# Altium PCB WX0.011.345PCB.PcbDoc
Units mil, origin at the board's own origin, x right, y up, seen from the top; angles counter-clockwise.
Board outline 2858.38 x 6639.95 mil, 2 copper layers (Top Layer, Bottom Layer); 15 components, 5 nets, 37 pads, 103 vias.
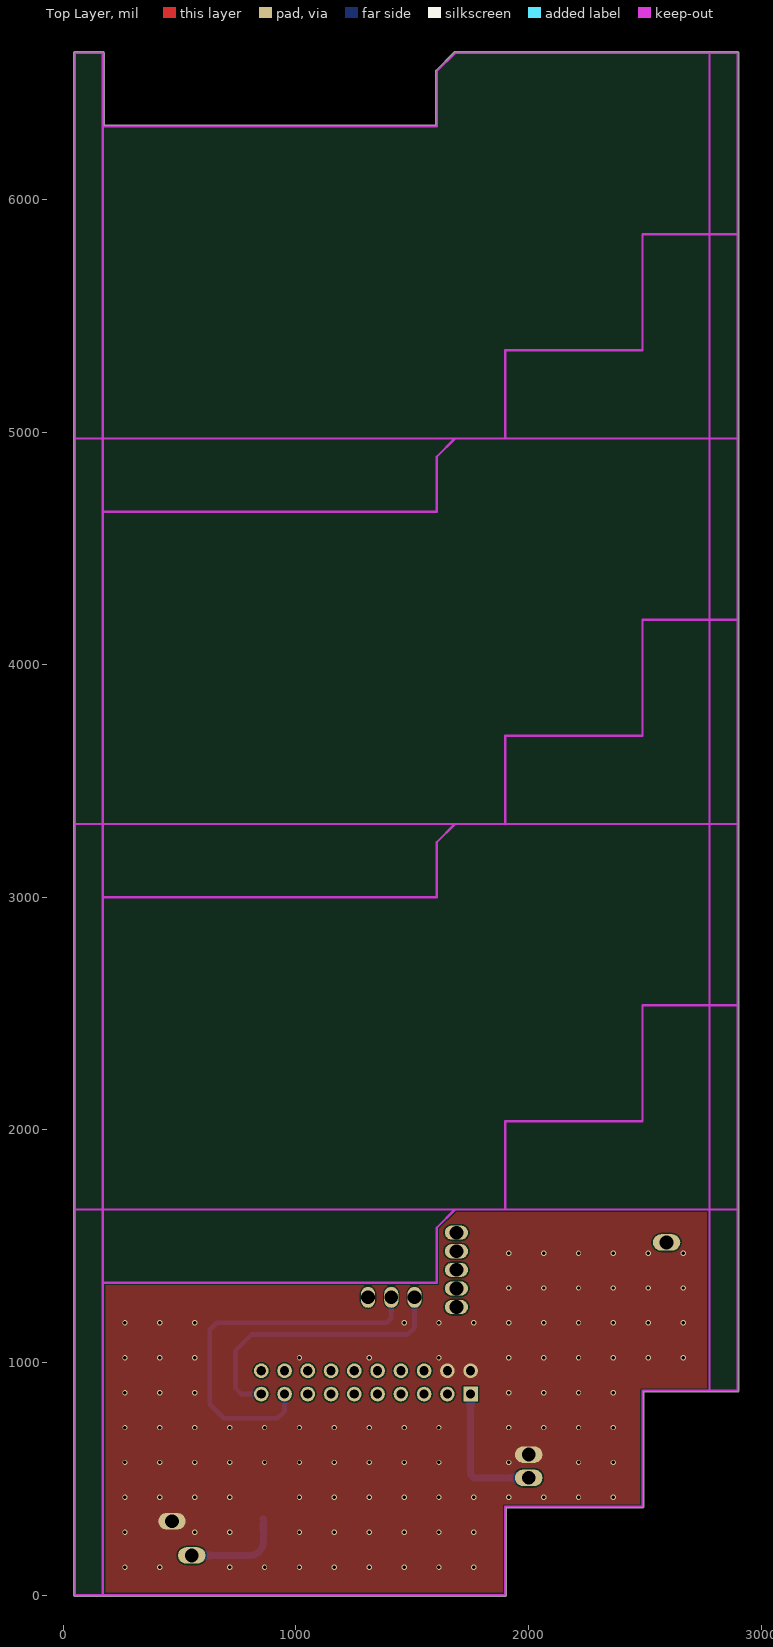
[diagram p0: Top Layer view]
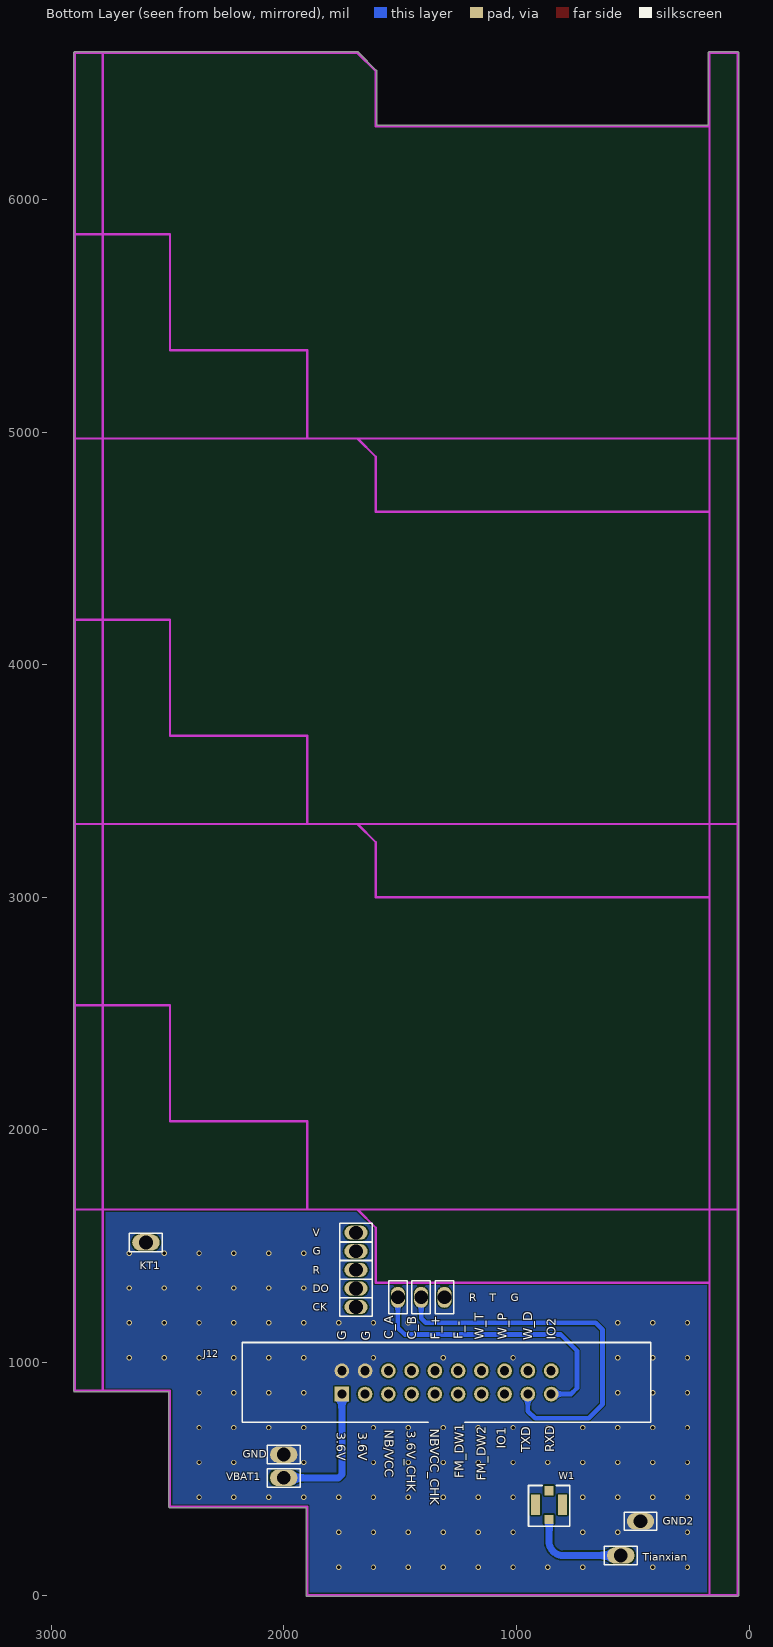
[diagram p1: Bottom Layer view, seen from below]

## Layer stack, top to bottom
Top Solder: solder mask 0.4, Solder Resist, Dk 3.5
Top Layer: signal copper 1.4
Dielectric 1: dielectric 12.6, FR-4, Dk 4.8
Bottom Layer: signal copper 1.4
Bottom Solder: solder mask 0.4, Solder Resist, Dk 3.5

## Board outline
44.98,0 ccw(c50,0) 50,-5.01 1900,-5.01 ccw(c1900,0) 1905.01,0 1905.01,374.98 2490,374.98 ccw(c2490,380) 2495.01,380 2495.01,873.33 2898.35,873.33 ccw(c2898.35,878.35) 2903.36,878.35 2903.36,6629.92 ccw(c2898.35,6629.92) 2898.35,6634.94 1683.86,6634.94 ccw(c1683.86,6629.92) 1680.29,6633.45 1680.31,6633.47 1601.57,6554.73 1601.59,6554.74 ccw(c1605.12,6551.18) 1600.1,6551.18 1600.1,6319.98 175.02,6319.98 175.02,6629.92 ccw(c170,6629.92) 170,6634.94 50,6634.94 ccw(c50,6629.92) 44.98,6629.92

## Design rules (kind name [scope] priority, off if disabled: settings)
Clearance [All] p1: gap=6 ignorepadtopadclearanceinfootprint=FALSE
ComponentClearance [All] p1: gap=0 collisioncheckmode=3 verticalgap=0 showdistances=FALSE
PlaneConnect [All] p1: planeconnectstyle=Direct reliefexpansion=20 reliefentries=4 reliefconductorwidth=10 reliefairgap=10
PolygonConnect [All] p1: connectstyle=Direct reliefconductorwidth=10 reliefentries=4 polygonreliefangle="90 Angle" airgapwidth=10
RoutingVias [All] p1: holewidth=28 width=50 viastyle="Through Hole" minholewidth=28 minwidth=50 maxholewidth=28 maxwidth=50
SilkToSilkClearance [All] p1: silktosilkclearance=0
SilkToSolderMaskClearance [IsPad] p1: minsilkscreentomaskgap=0 clearancetoexposedcopper=TRUE
SolderMaskExpansion [All] p1: expansion=4
Width [All] p1: maxlimit=50 minlimit=10 preferedwidth=10
26 further rules are at their usual default settings.

## Components (designator, comment, footprint, x,y, rotation, side; value= is the part's Value field where it differs from the comment)
CK "Test Point" TP5#1 1690.07,1237.96 r270 bottom (schematic designator TP1)
DO "Test Point" TP5#1 1690.07,1317.96 r270 bottom (schematic designator TP1)
G "Test Point" TP5#1 1690.07,1477.96 r270 bottom (schematic designator TP1)
G "Test Point" TP5#2 1310,1280 r0 bottom (schematic designator TP1)
GND "Test Point" TP5#3 2000.63,603.74 r270 bottom (schematic designator TP1)
GND2 "Test Point" TP5#3 466.91,317.22 r270 bottom (schematic designator TP1)
J12 "DC254_2*10" DC254_2*10 1301,914 r90 bottom (schematic designator J2)
KT1 "Test Point" TP5#3 2593.31,1515.75 r270 bottom (schematic designator TP1)
R "Test Point" TP5#1 1690.07,1397.96 r270 bottom (schematic designator TP1)
R "Test Point" TP5#2 1510,1280 r0 bottom (schematic designator TP1)
T "Test Point" TP5#2 1410,1280 r0 bottom (schematic designator TP1)
Tianxian "Test Point" TP5#3 551.91,169.99 r270 bottom (schematic designator TP1)
V "Test Point" TP5#1 1690.07,1557.96 r270 bottom (schematic designator TP1)
VBAT1 "Test Point" TP5#3 2000.63,503.74 r270 bottom (schematic designator TP1)
W1 "天线" ANT-IPEX 860,449.09 r0 bottom

## Footprints (in the part's own frame and the unit in brackets; to place one, negate y for a bottom-side part, rotate by r counter-clockwise, add the part's x,y. Pads: shape width x height; smd on the part's side, far side on the other; paste and mask are expansions set on the pad)
ANT-IPEX [mm] "IPX天线座"
  rect 1x1.05 smd: 1(0,0)
  rect 1x2.2 smd: 2(-1.475,1.55) 2(1.475,1.55)
  rect 1x1 smd: 2(0,3.151)
  silkscreen extent -2.26,-0.56 2.26,3.9
DC254_2*10 [mm]
  rect 1.6x1.6 hole 1: 1(-1.27,11.43)
  round 1.6 hole 1: 2(1.27,11.43) 3(-1.27,8.89) 4(1.27,8.89) 5(-1.27,6.35) 6(1.27,6.35) 7(-1.27,3.81) 8(1.27,3.81) 9(-1.27,1.27) 10(1.27,1.27) 11(-1.27,-1.27) 12(1.27,-1.27) 13(-1.27,-3.81) 14(1.27,-3.81) 15(-1.27,-6.35) 16(1.27,-6.35) 17(-1.27,-8.89) 18(1.27,-8.89) 19(-1.27,-11.43) 20(1.27,-11.43)
  silkscreen extent -4.35,-22.3 4.35,22.3
TP5#1 [mm]
  oval 1.546x2.543 hole 1.5: 1(0,0)
  silkscreen extent -1,-1.8 1,1.8
TP5#2 [mm]
  oval 1.546x2.289 hole 1.5: 1(0,0)
  silkscreen extent -1,-1.8 1,1.8
TP5#3 [mm]
  oval 1.8x3 hole 1.5: 1(0,0)
  silkscreen extent -1,-1.8 1,1.8

## Part data
CK DO G G GND GND2 KT1 R R T Tianxian V VBAT1: library part "Test Point  PASS", "测试点"
J12: library part 1010902-0139, "DC2 2.54mm 2x10pin,2.54mm间距，2x10pin，32×8.55×27.5mm,母头,双排,双排牛角座", Part Name=DC牛角座, ID=4, Part Number=1010902-0139, SMD/DIP=DIP
W1: library part 1010902-0145, "UB06000058A,3*3.1*1.25mm,公头,单排,IPEX一代板端"

## Via types
v1: diameter 23, hole 15, Top Layer to Bottom Layer, tented both sides, 103 vias

## Nets (pads, with @x,y where several pads share a name; then routed paths per layer and width w, separated by ;. In a path a pad name is that pad's centre, name@x,y a point inside that pad or via, vN(x,y) a via of type N, cw(c..) or ccw(c..) an arc to the next point about the centre after c; other vN are vias at no path point)
GND: GND2.1 GND.1 J12.2 J12.4
  other v1: 265,120 415,120 715,120 865,120 1015,120 1165,120 1315,120 1465,120 1615,120 1765,120 265,270 565,270 715,270 1015,270 1165,270 1315,270 1465,270 1615,270 1765,270 265,420 415,420 565,420 715,420 1015,420 1165,420 1315,420 1465,420 1615,420 1765,420 1915,420 2065,420 2215,420 2365,420 265,570 415,570 565,570 715,570 865,570 1015,570 1165,570 1315,570 1465,570 1615,570 1915,570 2215,570 2365,570 265,720 415,720 565,720 715,720 865,720 1015,720 1165,720 1315,720 1465,720 1615,720 1915,720 2065,720 2215,720 2365,720 265,870 415,870 565,870 1915,870 2065,870 2215,870 2365,870 265,1020 415,1020 565,1020 1015,1020 1315,1020 1615,1020 1915,1020 2065,1020 2215,1020 2365,1020 2515,1020 2665,1020 265,1170 415,1170 565,1170 1465,1170 1615,1170 1765,1170 1915,1170 2065,1170 2215,1170 2365,1170 2515,1170 2665,1170 1915,1320 2065,1320 2215,1320 2365,1320 2515,1320 2665,1320 1915,1470 2065,1470 2215,1470 2365,1470 2515,1470 2665,1470
RXD: J12.19 R.1@1510,1280 | length 1223.2
  Bottom Layer w20: J12.19 766,864 740,890 740,1050 810,1120 1480,1120 1510,1150 R.1@1510,1280
tianxian: Tianxian.1 W1.2@860,325.06 | length 440.4
  Bottom Layer w30: Tianxian.1 799.99,169.99 ccw(c799.99,230) 860,230 860,325.06 ccw(c858.07,325.06) W1.2@858.07,326.98
TXD: J12.17 T.1 | length 1643.8
  Bottom Layer w20: J12.17@950,863 J12.17 951,791 920,760 690,760 630,820 630,1140 660,1170 1390,1170 1410,1190 T.1
VBAT: J12.1 VBAT1.1 | length 601
  Bottom Layer w30: J12.1 1751,519 1766.26,503.74 VBAT1.1
pads on no net: CK.1 DO.1 G.1 J12.3 J12.5 J12.6 J12.7 J12.8 J12.9 J12.10 J12.11 J12.12 J12.13 J12.14 J12.15 J12.16 J12.18 J12.20 KT1.1 R.1@1690.07,1397.96 V.1 W1.1 W1.2@801.93,388.07 W1.2@918.07,388.07

## Polygon pours and split planes (outlines as drawn)
GND on Top Layer "Top Layer-No Net" (solid, remove dead copper, pour order 6): 164.98,0 ccw(c170,0) 170,-5.01 1900,-5.01 ccw(c1900,0) 1905.01,0 1905.01,374.98 2490,374.98 ccw(c2490,380) 2495.01,380 2495.01,873.33 2778.35,873.33 ccw(c2778.35,878.35) 2783.36,878.35 2783.36,1657.48 ccw(c2778.35,1657.48) 2778.35,1662.5 1683.86,1662.5 ccw(c1683.86,1657.48) 1680.29,1661.01 1680.31,1661.03 1601.57,1582.29 1601.59,1582.3 ccw(c1605.12,1578.74) 1600.1,1578.74 1600.1,1347.53 170,1347.53 ccw(c170,1342.52) 164.98,1342.52
GND on Bottom Layer "Top Layer-No Net1" (solid, remove dead copper, pour order 7): 164.98,0 ccw(c170,0) 170,-5.01 1900,-5.01 ccw(c1900,0) 1905.01,0 1905.01,374.98 2490,374.98 ccw(c2490,380) 2495.01,380 2495.01,873.33 2778.35,873.33 ccw(c2778.35,878.35) 2783.36,878.35 2783.36,1657.48 ccw(c2778.35,1657.48) 2778.35,1662.5 1683.86,1662.5 ccw(c1683.86,1657.48) 1680.29,1661.01 1680.31,1661.03 1601.57,1582.29 1601.59,1582.3 ccw(c1605.12,1578.74) 1600.1,1578.74 1600.1,1347.53 170,1347.53 ccw(c170,1342.52) 164.98,1342.52

## Keep-outs
Keep-Out Layer:
  lines w10: 2780,5850.79 2778.35,5850.79 ; 50,1657.48 50,3314.96 ; 50,1657.48 170,1657.48 ; 50,1657.48 50,0 170,0 ; 50,1657.48 170,1657.48 ; 50,3314.96 50,4972.44 ; 50,3314.96 170,3314.96 ; 50,3314.96 170,3314.96 ; 50,4972.44 50,6629.92 170,6629.92 ; 50,4972.44 170,4972.44 ; 50,4972.44 170,4972.44 ; 170,0 170,1657.48 ; 170,0 1900,0 1900,380 2490,380 2490,878.35 2778.35,878.35 ; 170,1657.48 1900,1657.48 1900,2037.48 2490,2037.48 2490,2535.83 2778.35,2535.83 ; 170,1657.48 170,3314.96 ; 170,1657.48 170,1342.52 692.52,1342.52 1093.31,1342.52 1605.12,1342.52 1605.12,1578.74 1683.86,1657.48 ; 170,1657.48 1683.86,1657.48 ; 170,3314.96 1900,3314.96 1900,3694.96 2490,3694.96 2490,4193.31 2778.35,4193.31 ; 170,3314.96 170,4972.44 ; 170,3314.96 1683.86,3314.96 ; 170,3314.96 170,3000 692.52,3000 1093.31,3000 1605.12,3000 1605.12,3236.22 1683.86,3314.96 ; 170,4972.44 1900,4972.44 1900,5352.44 2490,5352.44 2490,5850.79 2778.35,5850.79 ; 170,4972.44 170,6629.92 ; 170,4972.44 1683.86,4972.44 ; 170,4972.44 170,4657.48 692.52,4657.48 1093.31,4657.48 1605.12,4657.48 1605.12,4893.7 1683.86,4972.44 ; 170,6629.92 170,6314.96 692.52,6314.96 1093.31,6314.96 1605.12,6314.96 1605.12,6551.18 1683.86,6629.92 2778.35,6629.92 ; 1683.86,1657.48 2778.35,1657.48 ; 1683.86,3314.96 2778.35,3314.96 ; 1683.86,4972.44 2778.35,4972.44 ; 2778.35,878.35 2898.35,878.35 2898.35,1657.48 ; 2778.35,878.35 2778.35,1657.48 ; 2778.35,1657.48 2778.35,2535.83 ; 2778.35,1657.48 2898.35,1657.48 ; 2778.35,2535.83 2778.35,3314.96 ; 2778.35,2535.83 2898.35,2535.83 ; 2778.35,3314.96 2778.35,4193.31 ; 2778.35,3314.96 2898.35,3314.96 ; 2778.35,4193.31 2778.35,4972.44 ; 2778.35,4193.31 2898.35,4193.31 ; 2778.35,4972.44 2778.35,5850.79 ; 2778.35,4972.44 2898.35,4972.44 ; 2778.35,5850.79 2778.35,6629.92 ; 2778.35,5850.79 2898.35,5850.79 ; 2778.35,6629.92 2898.35,6629.92 2898.35,5850.79 ; 2898.35,1657.48 2898.35,2535.83 ; 2898.35,2535.83 2898.35,3314.96 ; 2898.35,3314.96 2898.35,4193.31 ; 2898.35,4193.31 2898.35,4972.44 ; 2898.35,4972.44 2898.35,5850.79

## Silkscreen, mask and mechanical layers (free items; w line width, h text height)
Bottom Overlay:
  text "C_A" at 1530,1100 h40 r270
  text "F_-" at 1231.05,1099.26 h40 r270
  text "IO2" at 831.05,1098.26 h40 r270
  text "W_T" at 1140.05,1098.26 h40 r270
  text "F_+" at 1329.05,1098.26 h40 r270
  text "C_B" at 1432.05,1098.26 h40 r270
  text "W_P" at 1041.05,1097.26 h40 r270
  text "G" at 1732.05,1096.26 h40 r270
  text "W_D" at 932.05,1095.26 h40 r270
  text "G" at 1628.05,1094.26 h40 r270
  text "NBVCC_CHK" at 1371.05,715.26 h40 r90
  text "NB/VCC" at 1567.05,710.26 h40 r90
  text "3.6V_CHK" at 1472.05,706.26 h40 r90
  text "3.6V" at 1772.05,700.26 h40 r90
  text "3.6V" at 1681.05,699.26 h40 r90
  text "IO1" at 1047.05,629.26 h40 r270
  text "RXD" at 838.05,613.26 h40 r270
  text "TXD" at 940.05,613.26 h40 r270
  text "FM_DW1" at 1226.05,502.26 h40 r270
  text "FM_DW2" at 1133.05,491.26 h40 r270